# EAGLE board Nano_Qwiic_Shield (EAGLE 9.1.0)
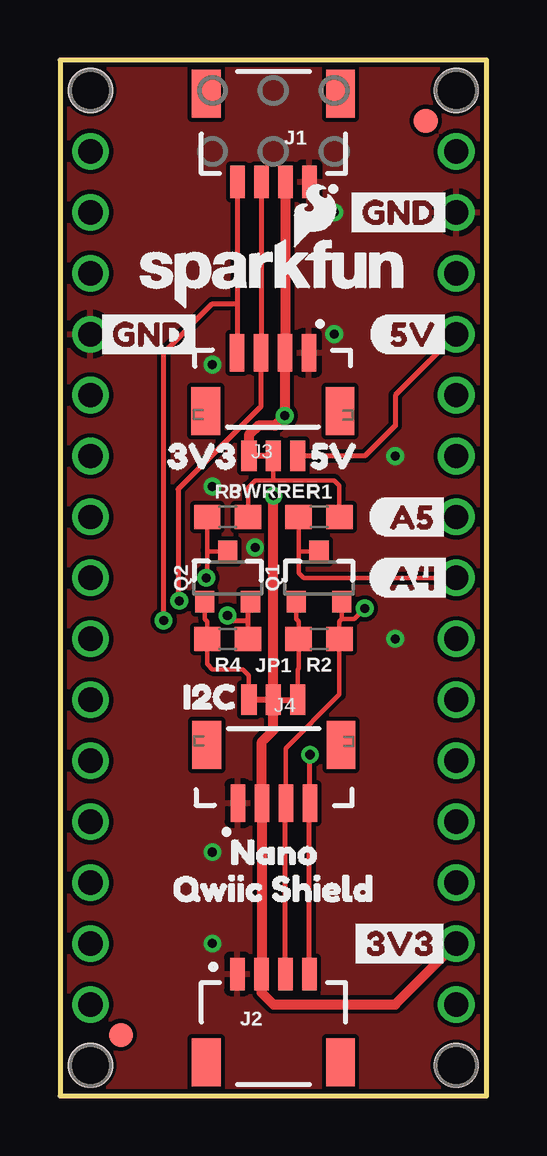
[diagram p0: board, top side]
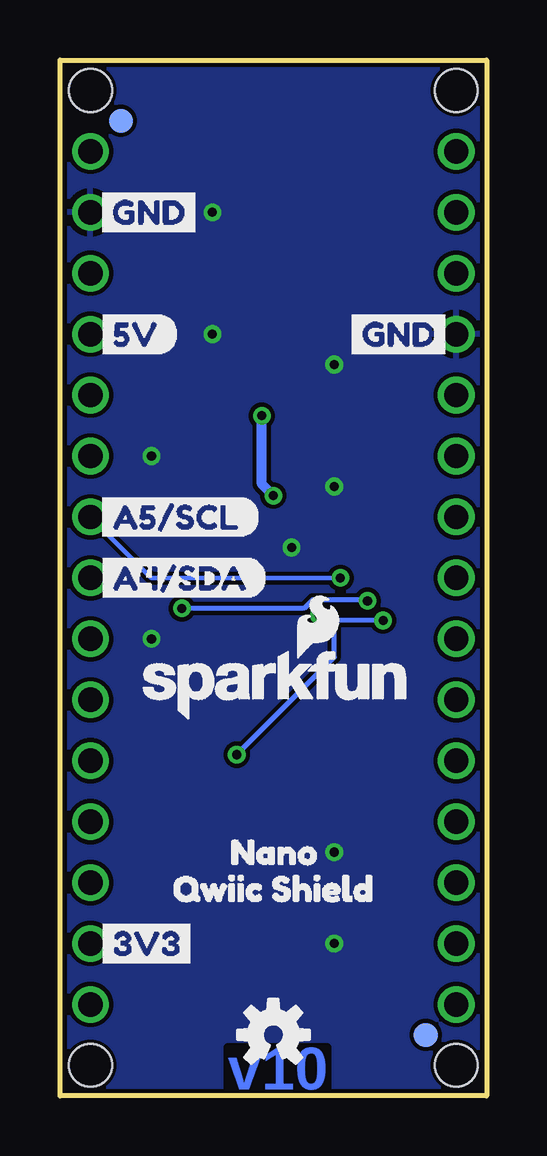
[diagram p1: board, bottom side, seen from below]

Size 17.78 x 43.18 mm. Coordinates in mm from the lower left corner, seen from the top.
Outline: 0,0 17.78,0 17.78,43.18 0,43.18 0,0
Copper layers (1*16): Top 0.035mm / dielectric 1.5mm / Bottom 0.035mm
Design rules "SparkFun-2-layer-TIGHT": minimum track width 7mil, minimum drill 15mil, track to track 7mil, track to pad 7mil, pad to pad 7mil, via to via 7mil, smd to smd 7mil, copper to edge 7mil, drill to drill 7mil, minimum pad ring 7mil, minimum via ring 7mil, stop-mask expansion 4mil, vias tented up to drill 25mil, thermal gap 10mil
Holes 1.78 mm at 1.27,41.91 16.51,41.91 16.51,1.27 1.27,1.27

## Footprints (pad centres in the part's own frame; a part is rotated, then mirrored left to right if it is on the bottom)
FIDUCIAL-1X2 = smd 1 x 1: 1 0,0
JST04_1MM_RA = smd 0.6 x 1.35: 1 -1.5,0; 2 -0.5,0; 3 0.5,0; 4 1.5,0 | smd 1.2 x 2: NC1 2.8,-3.675; NC2 -2.8,-3.675
JST04_1MM_VERT = smd 0.6 x 1.55: 1 -1.478,0.775; 2 -0.478,0.775; 3 0.522,0.775; 4 1.522,0.775 | smd 1.2 x 2: NC1 -2.778,3.2; NC2 2.822,3.2
NANO = drill 1.016: 1 -7.62,17.78; 2 -7.62,15.24; 3 -7.62,12.7; 4 -7.62,10.16; 5 -7.62,7.62; 6 -7.62,5.08; 7 -7.62,2.54; 8 -7.62,0; 9 -7.62,-2.54; 10 -7.62,-5.08; 11 -7.62,-7.62; 12 -7.62,-10.16; 13 -7.62,-12.7; 14 -7.62,-15.24; 15 -7.62,-17.78; 16 7.62,-17.78; 17 7.62,-15.24; 18 7.62,-12.7; 19 7.62,-10.16; 20 7.62,-7.62; 21 7.62,-5.08; 22 7.62,-2.54; 23 7.62,0; 24 7.62,2.54; 25 7.62,5.08; 26 7.62,7.62; 27 7.62,10.16; 28 7.62,12.7; 29 7.62,15.24; 30 7.62,17.78
SMT-JUMPER_3_2-NC_TRACE_NO-SILK = smd 0.635 x 1.27: 1 -1.016,0; 2 0,0; 3 1.016,0
SMT-JUMPER_3_1-NC_TRACE_NO-SILK = smd 0.635 x 1.27: 1 -1.016,0; 2 0,0; 3 1.016,0
SOT23-3 = smd 0.8 x 0.9: 1 -0.95,-1; 2 0.95,-1; 3 0,1.1
0603 = smd 1.1 x 1: 1 -0.85,0; 2 0.85,0

## Placement (x,y rotation side)
FD1  FIDUCIAL1X2  [FIDUCIAL-1X2]  2.54,2.54 0 top
FD2  FIDUCIAL1X2  [FIDUCIAL-1X2]  2.54,2.54 0 bottom
FD3  FIDUCIAL1X2  [FIDUCIAL-1X2]  15.24,40.64 0 top
FD4  FIDUCIAL1X2  [FIDUCIAL-1X2]  15.24,40.64 0 bottom
FRAME1  FRAME-LETTER  [CREATIVE_COMMONS]  -12.7,-7.62 0 top  (outside the outline)
J1  QWIIC_RIGHT_ANGLE  [JST04_1MM_RA]  8.89,38.1 180 top
J2  QWIIC_RIGHT_ANGLE  [JST04_1MM_RA]  8.89,5.08 0 top
J3  Vertical Qwiic Connector  [JST04_1MM_VERT]  8.89,31.75 180 top
J4  Vertical Qwiic Connector  [JST04_1MM_VERT]  8.89,11.43 0 top
J5  NANO_FOOTPRINT  [NANO]  8.89,21.59 0 top
JP1  JUMPER-SMT_3_2-NC_TRACE_NO-SILK  [SMT-JUMPER_3_2-NC_TRACE_NO-SILK]  8.89,16.51 0 top
LOGO1  OSHW-LOGOS  [OSHW-LOGO-S]  8.89,2.54 0 bottom
LOGO2  SFE_LOGO_NAME_FLAME.1_INCH  [SFE_LOGO_NAME_FLAME_.1]  8.89,34.29 0 top
LOGO3  SFE_LOGO_NAME_FLAME.1_INCH  [SFE_LOGO_NAME_FLAME_.1]  8.76,17.14 0 bottom
PWRREF  JUMPER-SMT_3_1-NC_TRACE_NO-SILK  [SMT-JUMPER_3_1-NC_TRACE_NO-SILK]  8.89,26.67 180 top
Q1  220mA/50V/3.5Ω  [SOT23-3]  10.79,21.59 0 top
Q2  220mA/50V/3.5Ω  [SOT23-3]  6.99,21.59 0 top
R1  4.7k  [0603]  10.79,24.13 0 top
R2  4.7k  [0603]  10.79,19.05 180 top
R3  4.7k  [0603]  6.99,24.13 0 top
R4  4.7k  [0603]  6.99,19.05 180 top
U$1  [QWIIC_SHIELD1]  3.81,8.64 0 top
U$2  [NANO1]  6.22,10.16 0 top
U$3  [A4#SDA5]  16.51,21.59 0 bottom
U$4  [A5#SCL4]  16.51,24.13 0 bottom
U$5  [GND0]  1.27,31.75 0 top
U$6  [GND0]  11.68,36.83 0 top
U$7  [GND0]  16.51,36.83 0 bottom
U$8  [GND0]  6.1,31.75 0 bottom
U$9  [A45]  12.83,21.59 0 top
U$10  [A56]  12.83,24.13 0 top
U$11  [I2C6]  4.19,16.64 0 top
U$12  [3V36]  11.81,6.35 0 top
U$13  [3V36]  16.51,6.35 0 bottom
U$14  [NANO1]  11.56,10.16 0 bottom
U$15  [QWIIC_SHIELD1]  13.97,8.64 0 bottom
U$16  [3V31]  3.56,26.67 0 top
U$17  [5V0]  9.53,26.67 0 top
U$18  [5V0]  16.51,31.75 0 bottom
U$19  [5V1]  12.83,31.75 0 top

## Library data of the parts
FD1-FD4 FRAME1 LOGO1-LOGO3 = SparkFun-Aesthetics
J1 J2 = SparkFun-Connectors; PROD_ID: CONN-13694
J3 J4 = SparkFun-Connectors; PROD_ID: CONN-14483
J5 = SparkFun-Boards
JP1 PWRREF = SparkFun-Jumpers
Q1 Q2 = SparkFun-DiscreteSemi; PROD_ID: TRANS-00830
R1-R4 = SparkFun-Resistors; PROD_ID: RES-07857
U$1 U$15 = buzzard_labels (17)
U$2 U$14 = buzzard_labels (18)
U$3-U$8 = buzzard_labels (19)
U$9 U$10 = buzzard_labels (20)
U$11 = buzzard_labels (22)
U$12 U$13 = buzzard_labels (23)
U$16 U$17 = buzzard_labels (27)
U$18 U$19 = buzzard_labels (28)

## Nets
3.3V: J1.2 J2.2 J3.2 J4.2 J5.17 JP1.2 PWRREF.3
5V: J5.27 PWRREF.1
GND: J1.1 J2.1 J3.1 J4.1 J5.4 J5.29
HV_SCL: J5.24 Q2.3 R3.1
HV_SDA: J5.23 Q1.3 R1.1
IOREF: PWRREF.2 R1.2 R3.2
SCL: J1.4 J2.4 J3.4 J4.4 Q2.2 R4.1
SCLJUMP: JP1.1 Q2.1 R4.2
SDA: J1.3 J2.3 J3.3 J4.3 Q1.2 R2.1
SDAJUMP: JP1.3 Q1.1 R2.2

## Tracks (layer width: path | path; a pad name or v marks a point on that pad's centre or on a via)
3.3V  (via drill 0.38)
  Top 0.203: 8.41,5.1 J2.2 | 9.39,31 J3.2
  Top 0.406: 8.41,5.1 J4.2 8.41,14.76 8.89,15.24 JP1.2 v8.89,25.02 | J2.2 8.39,4.31 8.89,3.81 13.97,3.81 J5.17 | J1.2 9.39,31 | J3.2 v9.37,28.35 8.96,27.94 8.26,27.94 7.87,27.56 PWRREF.3
  Bottom 0.406: v8.89,25.02 9.37,25.5 v9.37,28.35
5V
  Top 0.203: J5.27 13.97,29.21 13.97,27.94 12.7,26.67 PWRREF.1
GND  (via drill 0.38)
  other vias: 11.43,31.75 11.43,36.83 6.35,10.16 6.35,6.35 6.35,30.48 6.35,25.4 13.97,26.67 13.97,19.05 8.13,22.86
  pour Top: 0,43.18 17.78,43.18 17.78,0 0,0
  pour Bottom: 17.78,43.18 0,43.18 0,0 17.78,0
HV_SCL  (via drill 0.38)
  Top 0.178: v6.1,21.59 6.13,21.63 6.13,22.73 | R3.1 6.13,22.73 | Q2.3 6.18,22.69 6.13,22.73
  Bottom 0.178: J5.24 13.97,21.59 v6.1,21.59
HV_SDA
  Top 0.178: J5.23 10.16,21.59 9.95,21.8 9.95,22.73 | R1.1 9.95,22.73 | Q1.3 9.99,22.69 9.95,22.73
IOREF
  Top 0.178: PWRREF.2 8.89,25.65 | 8.89,25.65 8.13,25.65 7.83,25.36 R3.2 | R1.2 11.64,25.44 11.43,25.65 8.89,25.65
SCL  (via drill 0.38)
  Top 0.203: J2.4 10.39,12.18 J4.4 v10.41,14.22 | J1.4 7.39,33.02 | 7.39,33.02 7.39,31 J3.4 | R4.1 7.83,19.81 | 7.83,19.81 7.83,20.49 Q2.2 | v6.98,20.03 7.2,19.81 7.83,19.81 | v4.32,19.81 4.32,30.99 6.35,33.02 7.39,33.02
  Bottom 0.203: v4.32,19.81 6.35,19.81 | 6.35,19.81 6.77,19.81 v6.98,20.03 | v10.41,14.22 6.35,18.29 6.35,19.81
SCLJUMP
  Top 0.178: Q2.1 6.04,19.87 6.13,19.77 R4.2 6.13,18 6.35,17.78 7.62,17.78 7.87,17.53 JP1.1
SDA  (via drill 0.38)
  Top 0.178: 11.74,19.87 Q1.2 | 11.74,19.87 11.64,19.77 R2.1 11.64,16.73 9.41,14.49 J4.3 | 11.74,19.87 12.25,19.87 v12.7,20.32
  Top 0.203: J2.3 9.39,12.18 J4.3 | J1.3 8.39,31 J3.3 8.37,28.73 4.92,25.29 4.92,20.68 v4.97,20.64
  Bottom 0.203: v4.97,20.64 5,20.67 7.25,20.67 7.6,20.32 v12.7,20.32
SDAJUMP
  Top 0.178: Q1.1 9.85,19.87 9.95,19.77 R2.2 9.95,17.82 9.91,17.78 JP1.3

## Text on the board
Bottom: v10
tDocu: A. England